# EAGLE board PCB (EAGLE 9.7.0), part 1 of 2
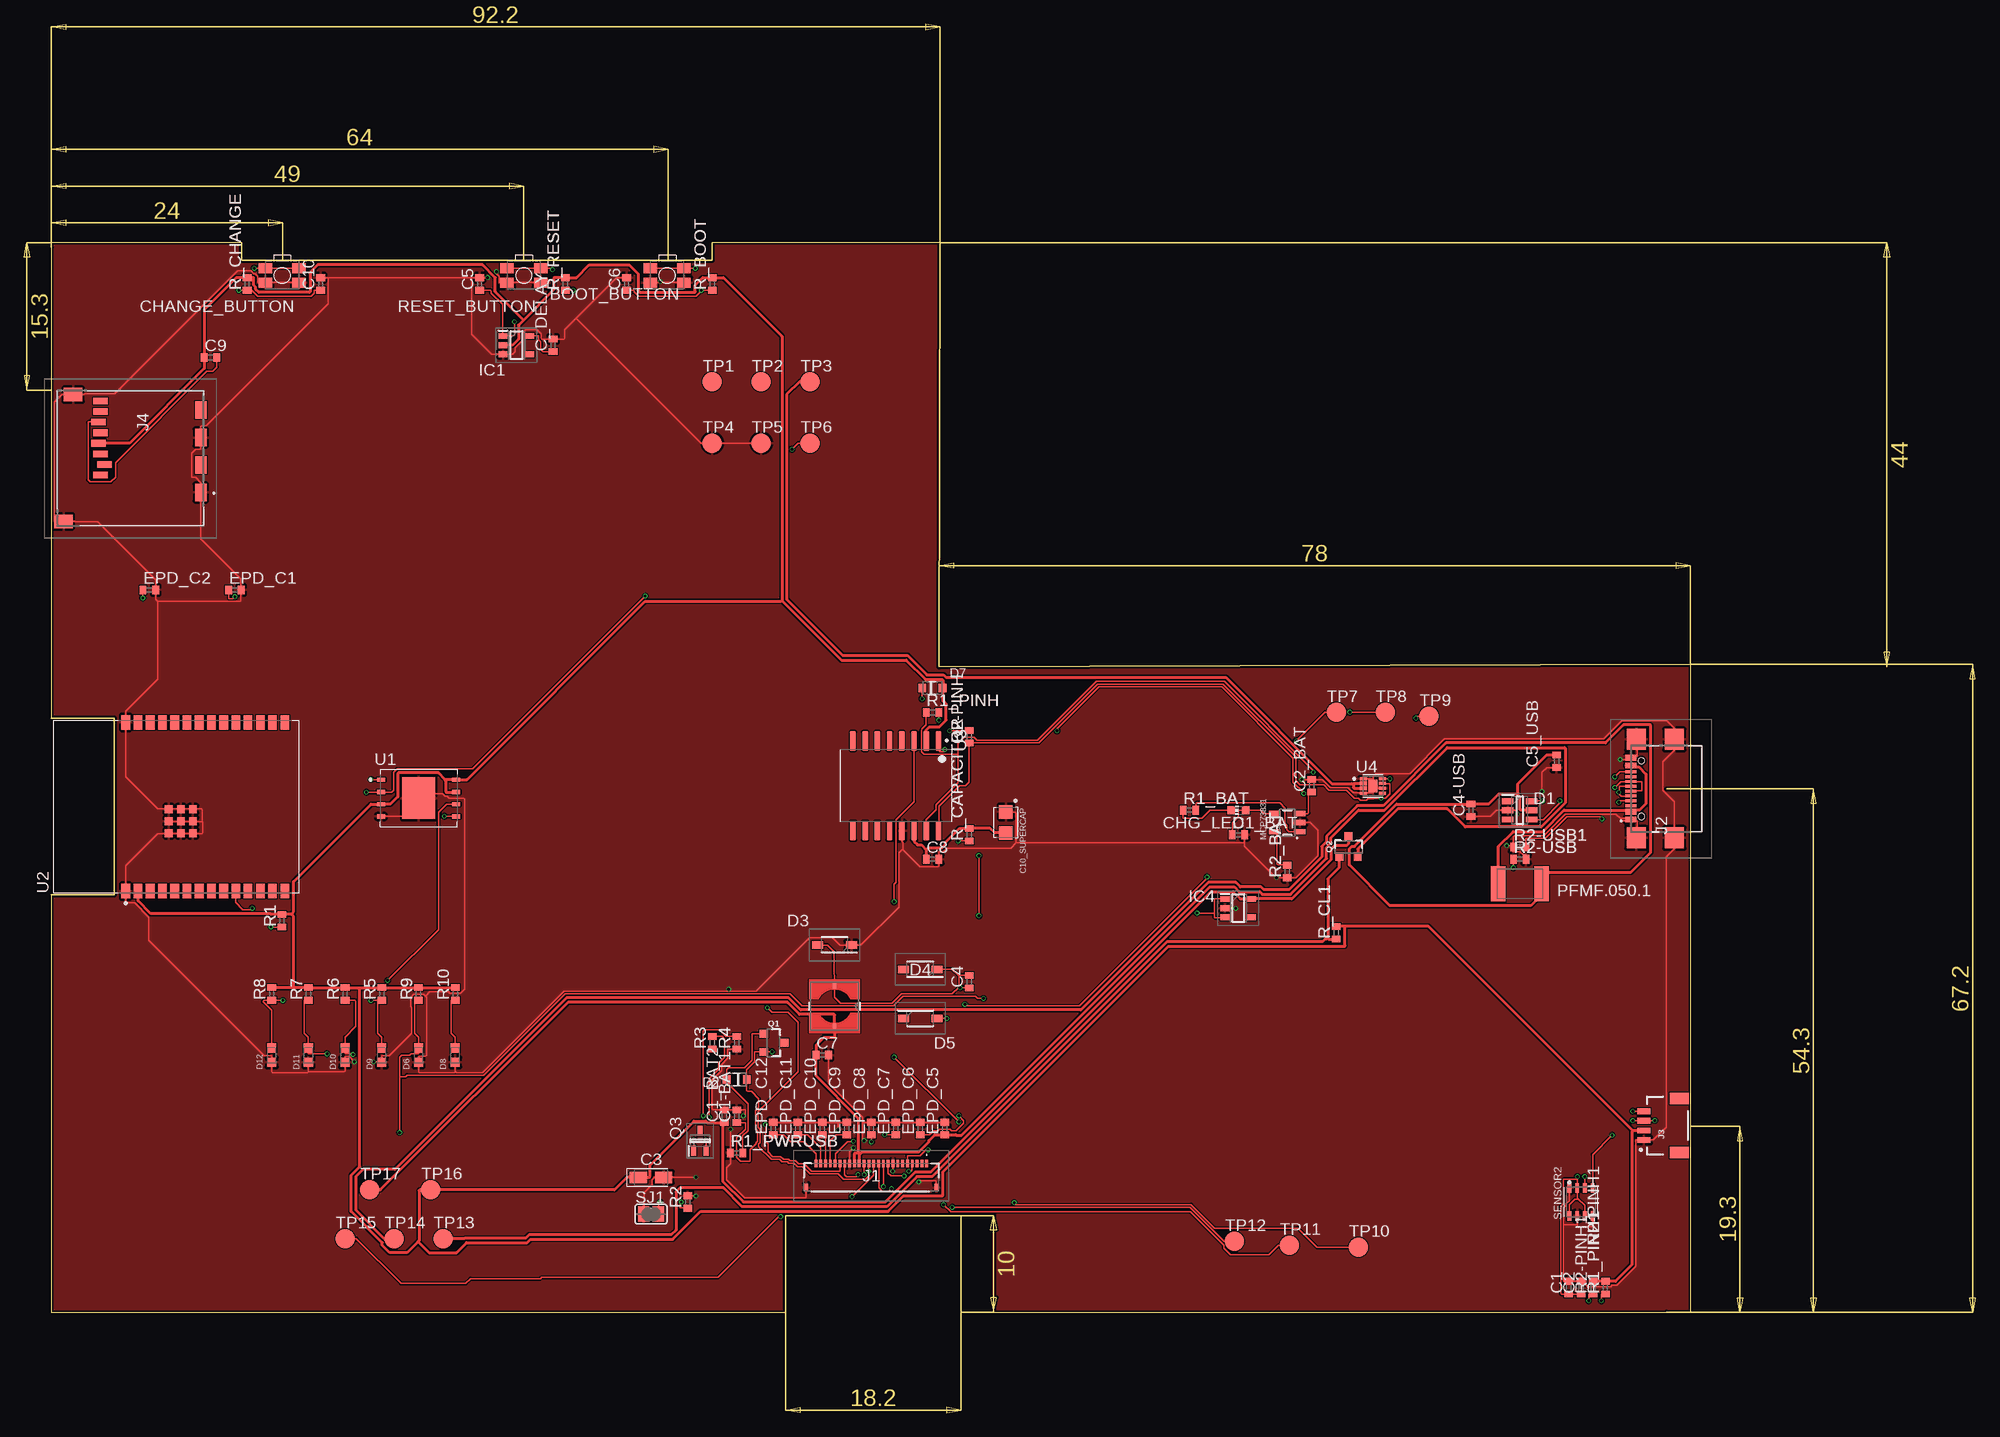
[diagram p0: board, top side]
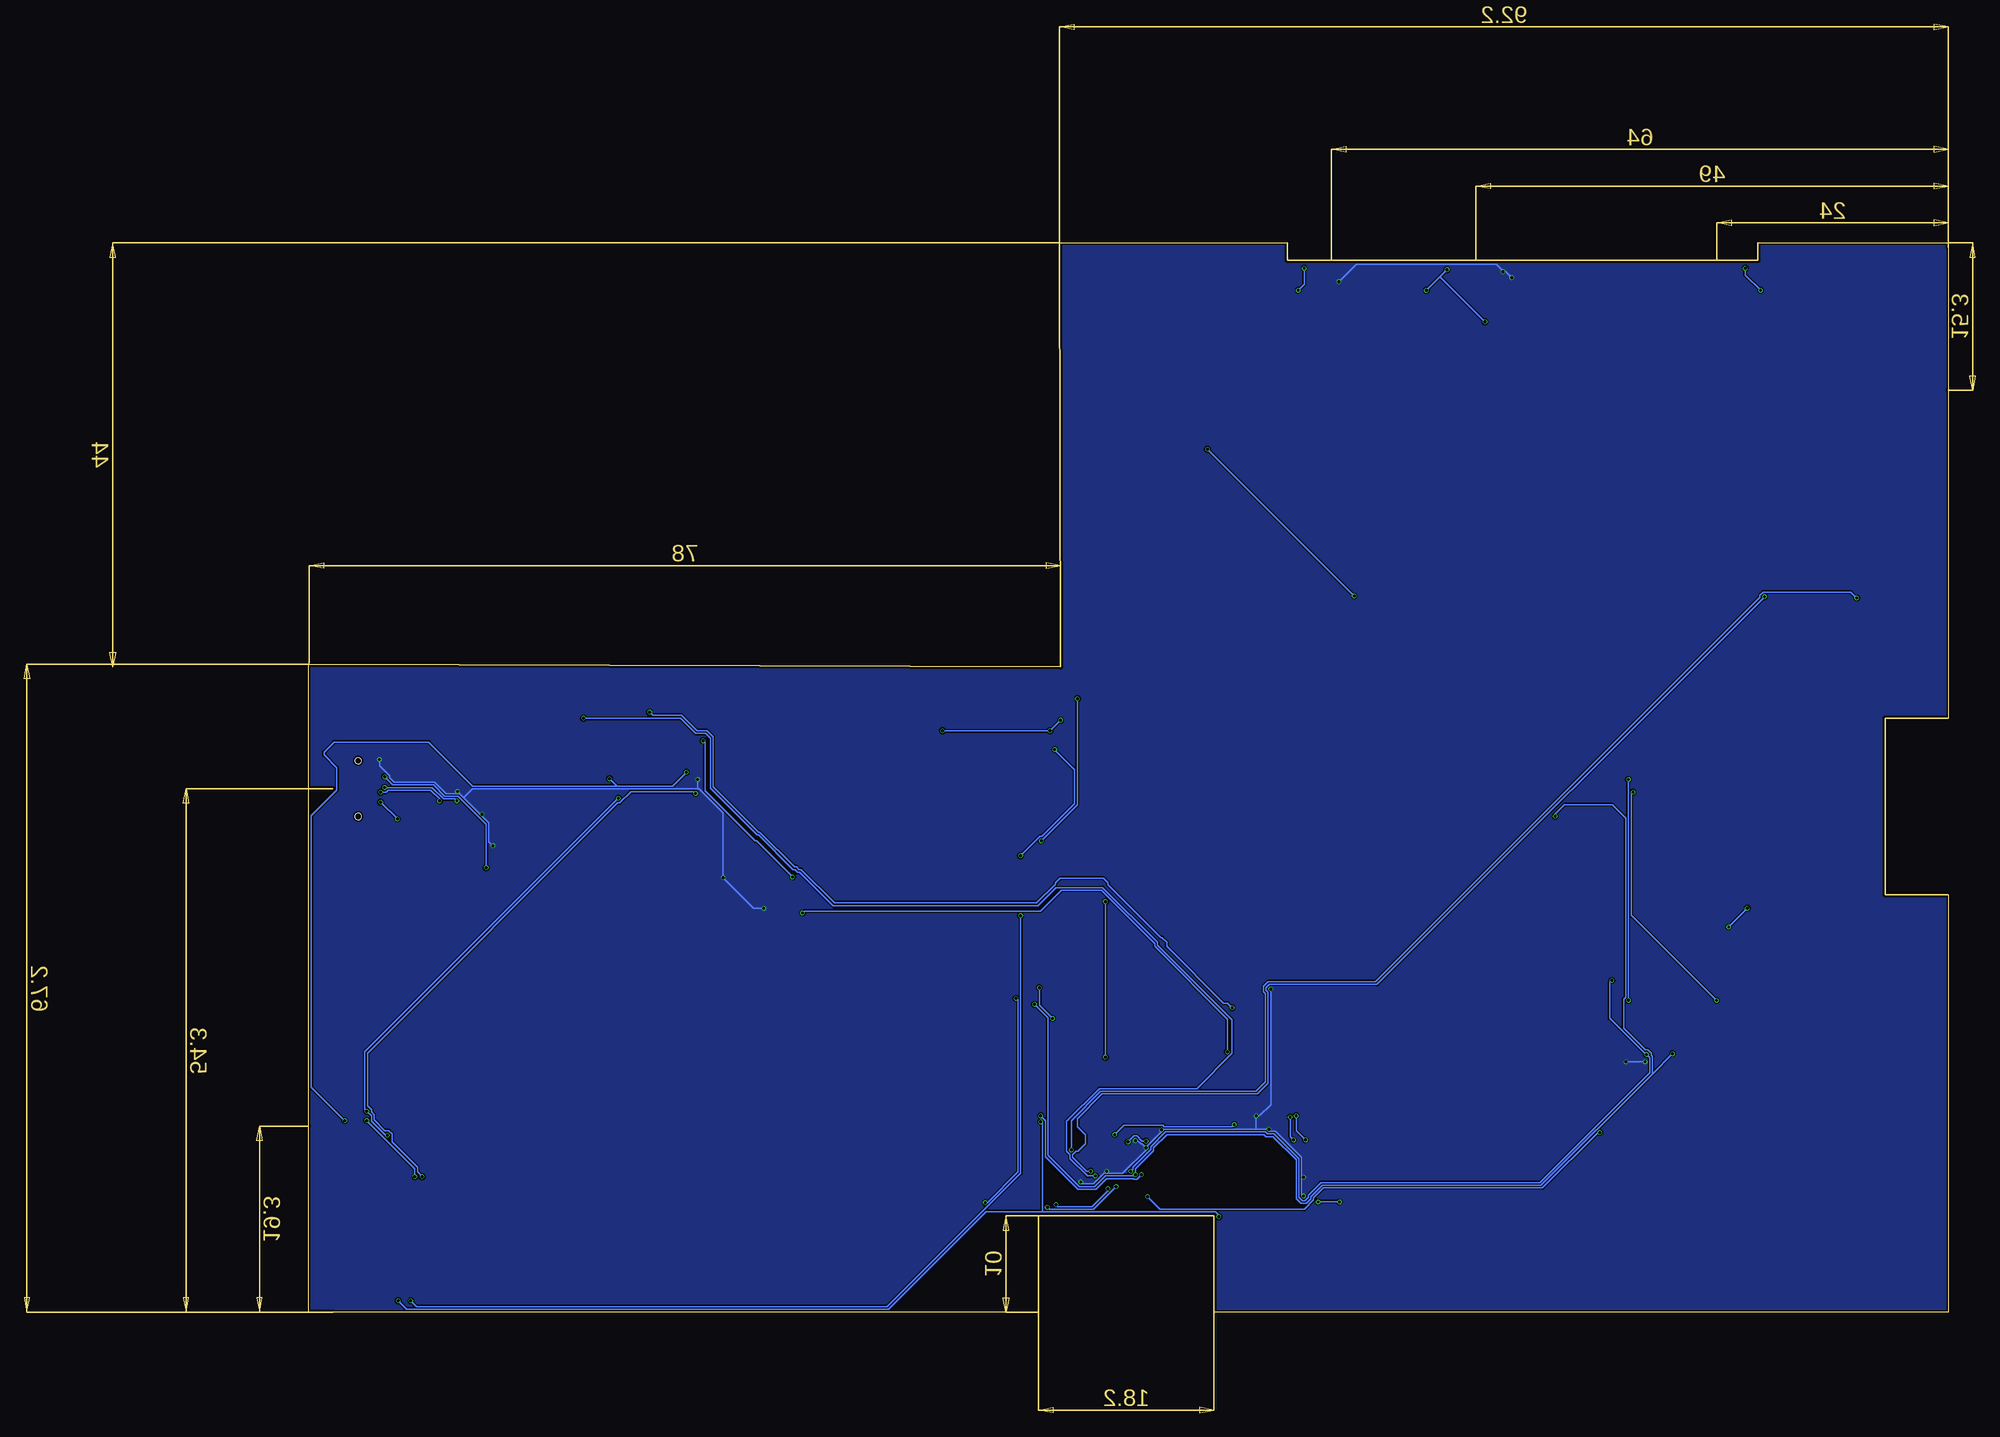
[diagram p1: board, bottom side, seen from below]

Size 170.16 x 110.97 mm. Coordinates in mm from the lower left corner, seen from the top.
Outline: 0,0 76.2,0 76.2,10 94.4,10 94.4,0 94.49,0 170.16,0 170.16,67.2 92.12,66.97 92.2,110.97 68.58,110.97 68.58,109.12 19.73,109.12 19.73,110.97 0,110.97 0,61.6 6.5,61.6 6.5,43.3 0,43.3 0,0
Copper layers (1*16): Top 0.035mm / dielectric 1.6mm / Bottom 0.035mm
Design rules "jlcpcb-2layers.dru": minimum track width 0.15mm, minimum drill 0.3mm, track to track 5mil, track to pad 5mil, pad to pad 5mil, via to via 5mil, smd to smd 5mil, copper to edge 0.2mm, drill to drill 6mil, minimum pad ring 10mil, minimum via ring 3mil, stop-mask expansion 4mil, vias tented up to drill 0mil, thermal gap 10mil
Net classes: 0 default: width 0.15 mm; 1 net class: width 0.3 mm

## Footprints (pad centres in the part's own frame; a part is rotated, then mirrored left to right if it is on the bottom)
MYBUTTON = smd 1.4 x 1.05: 1 1.75,0.75; 2 -1.75,0.75; 3 -1.75,-0.75; 4 1.75,-0.75
EAGLE-LTSPICE_C0402 = smd 0.7 x 0.9: 1 -0.65,0; 2 0.65,0
ESP32_WROVER_EAGLE-LTSPICE_C0402 = smd 0.7 x 0.9: 1 -0.65,0; 2 0.65,0
CAPMP3216X180N = smd 1.796 x 1.189: 1 -1.31,0; 2 1.31,0
CAPCP3225X100N = smd 1.4 x 1.4: 1 -1.1,0; 2 1.1,0
ADAFRUIT_CHIP-LED0603 = smd 0.8 x 0.8: A 0,-0.75; C 0,0.75
SOT95P280X145-6N = smd 1.2 x 0.6: 1 -1.25,0.95; 2 -1.25,0; 3 -1.25,-0.95; 4 1.25,-0.95; 5 1.25,0; 6 1.25,0.95
ESP32_WROVER_AVX---SD0805S020S1R0_AVX_SD0805S020S1R0_0 = smd 0.8 x 0.9: 1 -1.05,0; 2 1.05,0
SOD3716X135N = smd 1.15 x 0.8: 1 -1.75,0; 2 1.75,0
DIOC1608X36N = smd 0.97 x 0.94: 1 -0.75,0; 2 0.75,0
SOT95P280X125-5N = smd 0.9 x 0.6: 1 -1.4,0.95; 2 -1.4,0; 3 -1.4,-0.95; 4 1.4,-0.95; 5 1.4,0.95
SOT95P280X120-5N = smd 0.9 x 0.6: 1 -1.4,0.95; 2 -1.4,0; 3 -1.4,-0.95; 4 1.4,-0.95; 5 1.4,0.95
FH34SRJ24S05SH99 = smd 0.3 x 0.8: 1 5.75,1.45; 2 5.25,1.45; 3 4.75,1.45; 4 4.25,1.45; 5 3.75,1.45; 6 3.25,1.45; 7 2.75,1.45; 8 2.25,1.45; 9 1.75,1.45; 10 1.25,1.45; 11 0.75,1.45; 12 0.25,1.45; 13 -0.25,1.45; 14 -0.75,1.45; 15 -1.25,1.45; 16 -1.75,1.45; 17 -2.25,1.45; 18 -2.75,1.45; 19 -3.25,1.45; 20 -3.75,1.45; 21 -4.25,1.45; 22 -4.75,1.45; 23 -5.25,1.45; 24 -5.75,1.45 | smd 0.4 x 0.8: MP1 6.75,-1.05; MP2 -6.75,-1.05
SAMACSYS_PARTS_USB4110GFA = smd 0.3 x 1.15: A1 -3.35,3.678; A4 -2.55,3.678; A5 -1.25,3.678; A6 -0.25,3.678; A7 0.25,3.678; A8 1.25,3.678; A9 2.55,3.678; A12 3.35,3.678; B1 3.05,3.678; B4 2.25,3.678; B5 1.75,3.678; B6 0.75,3.678; B7 -0.75,3.678; B8 -1.75,3.678; B9 -2.25,3.678; B12 -3.05,3.678 | smd 2.18 x 2: MP1 -5.11,-0.827; MP2 5.11,-0.827; MP3 -5.11,3.103; MP4 5.11,3.103 | hole 0.65: -2.89,2.603; 2.89,2.603
JST04_1MM_RA = smd 0.6 x 1.35: 1 -1.5,0; 2 -0.5,0; 3 0.5,0; 4 1.5,0 | smd 1.2 x 2: NC1 2.8,-3.675; NC2 -2.8,-3.675
112ATAARR03ATTEND = smd 1.8 x 1.2: G1 10.6,10.4; G2 4.9,10.4; S1 7.75,10.4; S2 2.05,10.4 | smd 1.4 x 1.9: G3 13.6,-3.85; G4 0.45,-2.85 | smd 0.7 x 1.5: P1 8.8,0; P2 7.7,0.4; P3 6.6,0; P4 5.5,-0.2; P5 4.4,0; P6 3.3,-0.2; P7 2.2,0; P8 1.1,0
IND_4828-WE-TPC_WRE = smd 0.61 x 0.305: 1 -2.086,0; 2 2.086,0
ESP32_WROVER_SPARKFUN-IC-POWER_SOT23-5 = smd 0.55 x 1.2: 1 -0.95,-1.3; 2 0,-1.3; 3 0.95,-1.3; 4 0.95,1.3; 5 -0.95,1.3
ESP32C6_VARISTOR_CT/CN1812 = smd 1.5 x 3.6: 1 -2.25,0; 2 2.25,0
ESP32_WROVER_SPARKFUN-DISCRETESEMI_SOT23-3 = smd 0.8 x 0.9: 1 -0.95,-1; 2 0.95,-1; 3 0,1.1
SOT65P210X110-3N = smd 1.05 x 0.5: 1 -1.05,0.65; 2 -1.05,-0.65; 3 1.05,0
ESP32_WROVER_EAGLE-LTSPICE_R0402 = smd 0.7 x 0.9: 1 -0.65,0; 2 0.65,0
ESP32_WROVER_BME680_PSON80P300X300X100-8N = smd 1.016 x 0.5: 1 1.458,1.2; 2 1.458,0.4; 3 1.458,-0.4; 4 1.458,-1.2; 5 -1.458,-1.22; 6 -1.458,-0.4; 7 -1.458,0.4; 8 -1.458,1.2
SJ = smd 1.168 x 1.6: 1 -0.762,0; 2 0.762,0
TP20R = smd 2 x 2: TP 0,0
SON127P600X800X80-9N = smd 0.94 x 0.44: 1 -3.895,1.905; 2 -3.895,0.635; 3 -3.895,-0.635; 4 -3.895,-1.905; 5 3.895,-1.905; 6 3.895,-0.635; 7 3.895,0.635; 8 3.895,1.905 | smd 3.4 x 4.3: 9 0,0
XCVR_ESP32-C6-WROOM-1-N8 = smd 1.5 x 0.9: 1 -8.75,5.26; 2 -8.75,3.99; 3 -8.75,2.72; 4 -8.75,1.45; 5 -8.75,0.18; 6 -8.75,-1.09; 7 -8.75,-2.36; 8 -8.75,-3.63; 9 -8.75,-4.9; 10 -8.75,-6.17; 11 -8.75,-7.44; 12 -8.75,-8.71; 13 -8.75,-9.98; 14 -8.75,-11.25; 15 8.75,-11.25; 16 8.75,-9.98; 17 8.75,-8.71; 18 8.75,-7.44; 19 8.75,-6.17; 20 8.75,-4.9; 21 8.75,-3.63; 22 8.75,-2.36; 23 8.75,-1.09; 24 8.75,0.18; 25 8.75,1.45; 26 8.75,2.72; 27 8.75,3.99; 28 8.75,5.26 | smd 0.8 x 0.8: 29_1 -2.755,0.79; 29_2 -1.505,0.79; 29_3 -0.255,0.79; 29_4 -2.755,-0.46; 29_5 -1.505,-0.46; 29_6 -0.255,-0.46; 29_7 -2.755,-1.71; 29_8 -1.505,-1.71; 29_9 -0.255,-1.71
SOIC127P1032X265-16N = smd 2.05 x 0.59: 1 -4.655,4.445; 2 -4.655,3.175; 3 -4.655,1.905; 4 -4.655,0.635; 5 -4.655,-0.635; 6 -4.655,-1.905; 7 -4.655,-3.175; 8 -4.655,-4.445; 9 4.655,-4.445; 10 4.655,-3.175; 11 4.655,-1.905; 12 4.655,-0.635; 13 4.655,0.635; 14 4.655,1.905; 15 4.655,3.175; 16 4.655,4.445
SON50P200X200X80-9N = smd 0.76 x 0.27: 1 -0.985,0.75; 4 -0.985,-0.75; 5 0.985,-0.75; 6 0.985,-0.25; 7 0.985,0.25; 8 0.985,0.75 | smd 0.813 x 0.406: 2 -0.985,0.25; 3 -0.985,-0.25 | smd 0.9 x 1.3: 9 0,0

## Placement (x,y rotation side)
BOOT_BUTTON  BUTTON_CUSYOMV1  [MYBUTTON]  63.91,107.57 180 top
C1  100nF  [EAGLE-LTSPICE_C0402]  157.48,2.54 90 top
C1-BAT1  4.7uF  [ESP32_WROVER_EAGLE-LTSPICE_C0402]  71.12,20.32 90 top
C1_BAT  4.7uF  [EAGLE-LTSPICE_C0402]  123.19,49.53 0 top
C1_BAT2  4.7uF  [ESP32_WROVER_EAGLE-LTSPICE_C0402]  69.85,20.32 90 top
C2  100nF  [EAGLE-LTSPICE_C0402]  158.75,2.54 90 top
C2_BAT  4.7uF  [EAGLE-LTSPICE_C0402]  130.81,54.61 90 top
C3  100uF TANT  [CAPMP3216X180N]  62.23,13.97 0 top
C4  4.7uF/25V  [EAGLE-LTSPICE_C0402]  95.25,34.29 90 top
C4-USB  100nF  [ESP32_WROVER_EAGLE-LTSPICE_C0402]  147.32,52.07 90 top
C5  1uF  [EAGLE-LTSPICE_C0402]  44.45,106.68 90 top
C5_USB  4.7uF  [ESP32_WROVER_EAGLE-LTSPICE_C0402]  156.21,57.15 90 top
C6  100nF  [EAGLE-LTSPICE_C0402]  59.69,106.68 90 top
C7  10uF  [EAGLE-LTSPICE_C0402]  80.01,26.67 0 top
C8  100nF  [EAGLE-LTSPICE_C0402]  91.44,46.99 0 top
C9  100nF  [EAGLE-LTSPICE_C0402]  16.51,99.06 0 top
C10  100nF  [EAGLE-LTSPICE_C0402]  27.94,106.68 90 top
C10_SUPERCAP  CPH3225A  [CAPCP3225X100N]  99.06,50.8 270 top
C_DELAY  100nF  [EAGLE-LTSPICE_C0402]  52.07,100.33 90 top
CHANGE_BUTTON  BUTTON_CUSYOMV1  [MYBUTTON]  23.95,107.57 180 top
CHG_LED  [ADAFRUIT_CHIP-LED0603]  123.19,52.07 90 top
D1  USBLC6-2SC6Y  [SOT95P280X145-6N]  152.4,52.07 0 top
D2  ESP32_WROVER_AVX---SD0805S020S1R0_AVX_SD0805S020S1R0_0_0AVX_SD0805S020S1R0_0_0  [ESP32_WROVER_AVX---SD0805S020S1R0_AVX_SD0805S020S1R0_0]  71.12,24.13 180 top
D3  MBR0530  [SOD3716X135N]  81.28,38.1 180 top
D4  MBR0530  [SOD3716X135N]  90.17,35.56 180 top
D5  MBR0530  [SOD3716X135N]  90.17,30.48 0 top
D6  PGB1010603MR  [DIOC1608X36N]  38.1,26.67 90 top
D7  ESP32_WROVER_AVX---SD0805S020S1R0_AVX_SD0805S020S1R0_0_0AVX_SD0805S020S1R0_0_0  [ESP32_WROVER_AVX---SD0805S020S1R0_AVX_SD0805S020S1R0_0]  91.44,64.77 0 top
D8  PGB1010603MR  [DIOC1608X36N]  41.91,26.67 90 top
D9  PGB1010603MR  [DIOC1608X36N]  34.29,26.67 90 top
D10  PGB1010603MR  [DIOC1608X36N]  30.48,26.67 90 top
D11  PGB1010603MR  [DIOC1608X36N]  26.67,26.67 90 top
D12  PGB1010603MR  [DIOC1608X36N]  22.86,26.67 90 top
EPD_C1  1uF/50V  [EAGLE-LTSPICE_C0402]  19.05,74.93 0 top
EPD_C2  1uF/50V  [EAGLE-LTSPICE_C0402]  10.16,74.93 0 top
EPD_C5  1uF/50V  [EAGLE-LTSPICE_C0402]  92.71,19.05 90 top
EPD_C6  1uF/50V  [EAGLE-LTSPICE_C0402]  90.17,19.05 90 top
EPD_C7  1uF/50V  [EAGLE-LTSPICE_C0402]  87.63,19.05 90 top
EPD_C8  1uF/50V  [EAGLE-LTSPICE_C0402]  85.09,19.05 90 top
EPD_C9  1uF/50V  [EAGLE-LTSPICE_C0402]  82.55,19.05 90 top
EPD_C10  1uF/50V  [EAGLE-LTSPICE_C0402]  80.01,19.05 90 top
EPD_C11  1uF/50V  [EAGLE-LTSPICE_C0402]  77.47,19.05 90 top
EPD_C12  1uF/50V  [EAGLE-LTSPICE_C0402]  74.93,19.05 90 top
IC1  BD5229G-TR  [SOT95P280X125-5N]  48.26,100.33 0 top
IC4  XC6220A331MR-G  [SOT95P280X120-5N]  123.19,41.91 0 top
J1  FH34SRJ-24S-0.5SH_99_  [FH34SRJ24S05SH99]  85.09,13.97 0 top
J2  SAMACSYS_PARTS_USB4110-GF-A  [SAMACSYS_PARTS_USB4110GFA]  167.61,54.31 90 top
J3  QWIIC_RIGHT_ANGLE  [JST04_1MM_RA]  165.28,19.35 90 top
J4  112A-TAAR-R03_ATTEND  [112ATAARR03ATTEND]  5.1,95.65 270 top
L1  68uH  [IND_4828-WE-TPC_WRE]  81.28,31.75 270 top
MCP73831  ESP32_WROVER_SPARKFUN-IC-POWER_MCP73831  [ESP32_WROVER_SPARKFUN-IC-POWER_SOT23-5]  128.27,50.8 90 top
PFMF.050.1  ESP32C6_VARISTORCN1812  [ESP32C6_VARISTOR_CT/CN1812]  152.4,44.45 0 top
Q1  20V/4.2A/52mΩ/1.4W  [ESP32_WROVER_SPARKFUN-DISCRETESEMI_SOT23-3]  74.93,27.94 270 top
Q2  20V/4.2A/52mΩ/1.4W  [ESP32_WROVER_SPARKFUN-DISCRETESEMI_SOT23-3]  134.62,48.26 0 top
Q3  SI1308EDL-T1-GE3  [SOT65P210X110-3N]  67.31,17.78 90 top
R1  10K  [ESP32_WROVER_EAGLE-LTSPICE_R0402]  23.93,40.61 90 top
R1_BAT  200  [ESP32_WROVER_EAGLE-LTSPICE_R0402]  118.11,52.07 0 top
R1_PINH  10K  [ESP32_WROVER_EAGLE-LTSPICE_R0402]  91.44,62.23 0 top
R1_PINH1  10K  [ESP32_WROVER_EAGLE-LTSPICE_R0402]  161.29,2.54 90 top
R1_PWRUSB  100K  [ESP32_WROVER_EAGLE-LTSPICE_R0402]  71.12,16.51 0 top
R2  2.2  [ESP32_WROVER_EAGLE-LTSPICE_R0402]  66.04,11.43 90 top
R2-PINH  10K  [ESP32_WROVER_EAGLE-LTSPICE_R0402]  95.25,59.69 90 top
R2-PINH1  10K  [ESP32_WROVER_EAGLE-LTSPICE_R0402]  160.02,2.54 90 top
R2-USB  5k1  [ESP32_WROVER_EAGLE-LTSPICE_R0402]  152.4,46.99 0 top
R2-USB1  5k1  [ESP32_WROVER_EAGLE-LTSPICE_R0402]  152.4,48.26 0 top
R2_BAT  2K  [ESP32_WROVER_EAGLE-LTSPICE_R0402]  128.27,45.72 90 top
R3  0.47  [ESP32_WROVER_EAGLE-LTSPICE_R0402]  68.58,27.94 90 top
R4  10K  [ESP32_WROVER_EAGLE-LTSPICE_R0402]  71.12,27.94 90 top
R5  10K  [ESP32_WROVER_EAGLE-LTSPICE_R0402]  34.29,33.02 90 top
R6  10K  [ESP32_WROVER_EAGLE-LTSPICE_R0402]  30.48,33.02 90 top
R7  10K  [ESP32_WROVER_EAGLE-LTSPICE_R0402]  26.67,33.02 90 top
R8  10K  [ESP32_WROVER_EAGLE-LTSPICE_R0402]  22.86,33.02 90 top
R9  10K  [ESP32_WROVER_EAGLE-LTSPICE_R0402]  38.1,33.02 90 top
R10  10K  [ESP32_WROVER_EAGLE-LTSPICE_R0402]  41.91,33.02 90 top
R_BOOT  10K  [ESP32_WROVER_EAGLE-LTSPICE_R0402]  68.58,106.68 90 top
R_CAPACITOR  15  [ESP32_WROVER_EAGLE-LTSPICE_R0402]  95.25,49.53 90 top
R_CHANGE  10K  [ESP32_WROVER_EAGLE-LTSPICE_R0402]  20.32,106.68 90 top
R_CL1  10K  [ESP32_WROVER_EAGLE-LTSPICE_R0402]  133.35,39.37 90 top
R_RESET  10K  [ESP32_WROVER_EAGLE-LTSPICE_R0402]  53.34,106.68 90 top
RESET_BUTTON  BUTTON_CUSYOMV1  [MYBUTTON]  49.02,107.57 180 top
SENSOR2  ESP32_WROVER_BME680_BME680  [ESP32_WROVER_BME680_PSON80P300X300X100-8N]  158.75,11.43 90 top
SJ1  [SJ]  62.23,10.16 0 top
TP1  TPTP20R  [TP20R]  68.58,96.52 0 top
TP2  TPTP20R  [TP20R]  73.66,96.52 0 top
TP3  TPTP20R  [TP20R]  78.74,96.52 0 top
TP4  TPTP20R  [TP20R]  68.58,90.17 0 top
TP5  TPTP20R  [TP20R]  73.66,90.17 0 top
TP6  TPTP20R  [TP20R]  78.74,90.17 0 top
TP7  TPTP20R  [TP20R]  133.35,62.23 0 top
TP8  TPTP20R  [TP20R]  138.43,62.23 0 top
TP9  TPTP20R  [TP20R]  142.98,61.83 0 top
TP10  TPTP20R  [TP20R]  135.66,6.75 0 top
TP11  TPTP20R  [TP20R]  128.48,6.95 0 top
TP12  TPTP20R  [TP20R]  122.8,7.35 0 top
TP13  TPTP20R  [TP20R]  40.64,7.62 0 top
TP14  TPTP20R  [TP20R]  35.56,7.62 0 top
TP15  TPTP20R  [TP20R]  30.48,7.62 0 top
TP16  TPTP20R  [TP20R]  39.37,12.7 0 top
TP17  TPTP20R  [TP20R]  33.02,12.7 0 top
U1  W25Q512JVEIQ  [SON127P600X800X80-9N]  38.1,53.34 0 top
U2  ESP32-C6-WROOM-1-N8  [XCVR_ESP32-C6-WROOM-1-N8]  12.97,52.44 90 top
U3  DS3231SN#  [SOIC127P1032X265-16N]  87.63,54.61 270 top
U4  MAX17048G+T10  [SON50P200X200X80-9N]  137.16,54.61 0 top

## Library data of the parts
BOOT_BUTTON CHANGE_BUTTON CHG_LED PFMF.050.1 RESET_BUTTON SJ1 TP1-TP17 = DeskAssistant v19 v1
C1 C1-BAT1 C1_BAT C1_BAT2 C2 C2_BAT C4 C4-USB C5 C5_USB C6-C10 C_DELAY EPD_C1 EPD_C2 EPD_C5-EPD_C12 = DeskAssistant v19 v1; SPICEMODEL: NONE; SPICEPREFIX: C
C3 = Capacitor; CATEGORY: Capacitor; PACKAGE_SIZE: 1206; PACKAGE_TYPE: SMD; SUBCATEGORY: Tantalum Capacitors; TYPE: Polymer Capacitors
C10_SUPERCAP = DeskAssistant v19 v1; AVAILABILITY: Not in stock; CHECK_PRICES: https://www.snapeda.com/parts/CPH3225A/Seiko+Instruments/view-part/?ref=eda; DESCRIPTION: 11 mF (EDLC) Supercapacitor 3.3 V 1210 (3225 Metric) - -; MF: Seiko Instruments; MP: CPH3225A; PACKAGE: 1210 Seiko; PRICE: None; PURCHASE-URL: https://www.snapeda.com/api/url_track_click_mouser/?unipart_id=562593&manufacturer=Seiko Instruments&part_name=CPH3225A&search_term=None; SNAPEDA_LINK: https://www.snapeda.com/parts/CPH3225A/Seiko+Instruments/view-part/?ref=snap
D1 = DeskAssistant v19 v1; AVAILABILITY: In Stock; CHECK_PRICES: https://www.snapeda.com/parts/USBLC6-2SC6Y/STMicroelectronics/view-part/?ref=eda; DESCRIPTION: 17V Clamp 5A (8/20µs) Ipp Tvs Diode Surface Mount SOT-23-6; MF: STMicroelectronics; MP: USBLC6-2SC6Y; PACKAGE: SOT-23-6 STMicroelectronics; PRICE: None; SNAPEDA_LINK: https://www.snapeda.com/parts/USBLC6-2SC6Y/STMicroelectronics/view-part/?ref=snap
D2 D7 = DeskAssistant v19 v1; CENTROID_NOT_SPECIFIED: No; DATASHEET: http://datasheets.avx.com/schottky.pdf; DIGIKEY_DESCRIPTION: DIODE SCHOTTKY 20V 1A 0805; DIGIKEY_PART_NUMBER: 478-7800-1-ND; LEAD_FREE: yes; MF: AVX; MOUSER_PART_NUMBER: 581-SD0805S020S1R0; PACKAGE: 0805 (2012 metric); PREFIX: D; ROHS: yes; TEMPERATURE_RANGE_HIGH: +125°C; TEMPERATURE_RANGE_LOW: -55°C
D3-D5 = DeskAssistant v19 v1; AVAILABILITY: In Stock; CHECK_PRICES: https://www.snapeda.com/parts/MBR0530/Onsemi/view-part/?ref=eda; DESCRIPTION: Diode Schottky 30 V 500mA Surface Mount SOD-123; MF: ON Semiconductor; MP: MBR0530; PACKAGE: SOD-123-2 ON Semiconductor; PRICE: None; PURCHASE-URL: https://www.snapeda.com/api/url_track_click_mouser/?unipart_id=179458&manufacturer=ON Semiconductor&part_name=MBR0530&search_term=None; SNAPEDA_LINK: https://www.snapeda.com/parts/MBR0530/Onsemi/view-part/?ref=snap
D6 D8-D12 = DeskAssistant v19 v1; AVAILABILITY: In Stock; CHECK_PRICES: https://www.snapeda.com/parts/PGB1010603MR/Littelfuse/view-part/?ref=eda; DESCRIPTION: 150V (Typ) Clamp - Ipp Tvs Diode Surface Mount 0603 (1608 Metric); MF: Littelfuse Inc.; MP: PGB1010603MR; PACKAGE: 0603 Littelfuse Inc.; PRICE: None; PURCHASE-URL: https://www.snapeda.com/api/url_track_click_mouser/?unipart_id=5659453&manufacturer=Littelfuse Inc.&part_name=PGB1010603MR&search_term=None; SNAPEDA_LINK: https://www.snapeda.com/parts/PGB1010603MR/Littelfuse/view-part/?ref=snap
IC1 = DeskAssistant v19 v1; DESCRIPTION: Voltage Detector with Adjustable Delay Time: CMOS processes are utilized to develop high precision, low current consumption CMOS reset ICs that allow arbitrary setting of the delay time. The extensive lineup includes both Nch Open Drain and CMOS output types in a wide range of detection voltages (from 2.3V to 6.0V, in 0.1V steps), enabling selection of the ideal solution based on customer requirements. In addition, the entire series is of course both lead-free and RoHS-compliant.; HEIGHT: 1.25mm; MANUFACTURER_NAME: ROHM Semiconductor; MANUFACTURER_PART_NUMBER: BD5229G-TR; MOUSER_PART_NUMBER: 755-BD5229G-TR; MOUSER_PRICE-STOCK: https://www.mouser.co.uk/ProductDetail/ROHM-Semiconductor/BD5229G-TR?qs=4kLU8WoGk0vvnhrrYwdszw%3D%3D
IC4 = DeskAssistant v19 v1; DESCRIPTION: LDO Voltage Regulators; HEIGHT: 1.2mm; MANUFACTURER_NAME: Torex; MANUFACTURER_PART_NUMBER: XC6220A331MR-G; MOUSER_PART_NUMBER: 865-XC6220A331MR-G; MOUSER_PRICE-STOCK: https://www.mouser.co.uk/ProductDetail/Torex-Semiconductor/XC6220A331MR-G?qs=AsjdqWjXhJ8ZSWznL1J0gg%3D%3D
J1 = DeskAssistant v19 v1; DESCRIPTION: 24 Position FFC, FPC Connector Contacts, Top and Bottom 0.020" (0.50mm) Surface Mount, Right Angle; HEIGHT: 1.1mm; MANUFACTURER_NAME: Hirose; MANUFACTURER_PART_NUMBER: FH34SRJ-24S-0.5SH(99); MOUSER_PART_NUMBER: 798-FH34SRJ24S05SH99; MOUSER_PRICE-STOCK: https://www.mouser.co.uk/ProductDetail/Hirose-Connector/FH34SRJ-24S-0.5SH99?qs=vcbW%252B4%252BSTIpKBl5ap9J8Fw%3D%3D
J2 = DeskAssistant v19 v1; DESCRIPTION: CONN USB 2.0 TYPE-C R/A SMT; HEIGHT: 3.26mm; MANUFACTURER_NAME: GCT (GLOBAL CONNECTOR TECHNOLOGY); MANUFACTURER_PART_NUMBER: USB4110-GF-A; MOUSER_PART_NUMBER: 640-USB4110-GF-A; MOUSER_PRICE-STOCK: https://www.mouser.co.uk/ProductDetail/GCT/USB4110-GF-A?qs=KUoIvG%2F9IlYiZvIXQjyJeA%3D%3D
J3 = DeskAssistant v19 v1; PROD_ID: CONN-13694
J4 = DeskAssistant v19 v1; DESCRIPTION: Micro SD Card Socket, Push-Push Type, Top Mount, SMT, H=1.83mm, 10u; HEIGHT: 1.9mm; MANUFACTURER_NAME: ATTEND; MANUFACTURER_PART_NUMBER: 112A-TAAR-R03 ATTEND
L1 = DeskAssistant v19 v1; COPYRIGHT: Copyright (C) 2024 Ultra Librarian. All rights reserved.; MANUFACTURER_PART_NUMBER: 744043680; MFR_NAME: Wurth Electronics
MCP73831 = DeskAssistant v19 v1; PROD_ID: IC-09995
Q1 Q2 = DeskAssistant v19 v1; PROD_ID: TRAN-14388
Q3 = DeskAssistant v19 v1; AVAILABILITY: In Stock; CHECK_PRICES: https://www.snapeda.com/parts/SI1308EDL-T1-GE3/Vishay+Siliconix/view-part/?ref=eda; DESCRIPTION: Si1308EDL-T1-GE3 N-channel MOSFET Transistor, 1.5 A, 30 V, 3-Pin SC-70 | Siliconix / Vishay SI1308EDL-T1-GE3; MF: Vishay Siliconix; MP: SI1308EDL-T1-GE3; PACKAGE: SOT-323 Vishay Semiconductor; PRICE: None; PURCHASE-URL: https://www.snapeda.com/api/url_track_click_mouser/?unipart_id=274603&manufacturer=Vishay Siliconix&part_name=SI1308EDL-T1-GE3&search_term=None; SNAPEDA_LINK: https://www.snapeda.com/parts/SI1308EDL-T1-GE3/Vishay+Siliconix/view-part/?ref=snap
R1 R1_BAT R1_PINH R1_PINH1 R1_PWRUSB R2 R2-PINH R2-PINH1 R2-USB R2-USB1 R2_BAT R3-R10 R_BOOT R_CAPACITOR R_CHANGE R_CL1 R_RESET = DeskAssistant v19 v1; SPICEMODEL: NONE; SPICEPREFIX: R
SENSOR2 = DeskAssistant v19 v1; AVAILABILITY: Unavailable; DESCRIPTION: Integrated Environmental Unit; MF: Bosch Sensortec; MP: BME680; PACKAGE: LGA-8 Bosch Tools; PRICE: None
U1 = DeskAssistant v19 v1; AVAILABILITY: In Stock; CHECK_PRICES: https://www.snapeda.com/parts/W25Q512JVEIQ/Winbond+Electronics/view-part/?ref=eda; DESCRIPTION: FLASH - NOR Memory IC 512Mb (64M x 8) SPI - Quad I/O 133 MHz 8-WSON (8x6); MF: Winbond Electronics; MP: W25Q512JVEIQ; PACKAGE: Package; PRICE: None; SNAPEDA_LINK: https://www.snapeda.com/parts/W25Q512JVEIQ/Winbond+Electronics/view-part/?ref=snap
U2 = DeskAssistant v19 v1; AVAILABILITY: In Stock; CHECK_PRICES: https://www.snapeda.com/parts/ESP32-C6-WROOM-1-N8/Espressif+Systems/view-part/?ref=eda; DESCRIPTION: Multiprotocol Modules ESP32-C6 module, Wi-Fi 6 in 2.4 GHz band, Bluetooth 5, Zigbee 3.0 and Thread. ESP34-WROOM Compatible - ENGINEERING SAMPLE; MF: Espressif Systems; MP: ESP32-C6-WROOM-1-N8; PACKAGE: None; PRICE: None; SNAPEDA_LINK: https://www.snapeda.com/parts/ESP32-C6-WROOM-1-N8/Espressif+Systems/view-part/?ref=snap
U3 = DeskAssistant v19 v1; AVAILABILITY: In Stock; CHECK_PRICES: https://www.snapeda.com/parts/DS3231SN%23/Analog+Devices/view-part/?ref=eda; DESCRIPTION: Extremely Accurate I²C-Integrated RTC/TCXO/Crystal; MF: Analog Devices; MP: DS3231SN#; PACKAGE: SOIC-16 Maxim; PRICE: None; PURCHASE-URL: https://www.snapeda.com/api/url_track_click_mouser/?unipart_id=99048&manufacturer=Analog Devices&part_name=DS3231SN#&search_term=None; SNAPEDA_LINK: https://www.snapeda.com/parts/DS3231SN%23/Analog+Devices/view-part/?ref=snap
U4 = DeskAssistant v19 v1; AVAILABILITY: In Stock; CHECK_PRICES: https://www.snapeda.com/parts/MAX17048G+T10/Analog+Devices/view-part/?ref=eda; DESCRIPTION: 3µA 1-Cell/2-Cell Fuel Gauge with ModelGauge; MF: Analog Devices; MP: MAX17048G+T10; PACKAGE: TDFN-8 Maxim; PRICE: None; PURCHASE-URL: https://www.snapeda.com/api/url_track_click_mouser/?unipart_id=329239&manufacturer=Analog Devices&part_name=MAX17048G+T10&search_term=None; SNAPEDA_LINK: https://www.snapeda.com/parts/MAX17048G+T10/Analog+Devices/view-part/?ref=snap

## Nets
3V3 [net class]: C1_BAT2.1 C3.1 C9.1 D7.2 IC1.2 IC4.5 J3.2 J4.P4 Q2.3 R1.2 R1_PINH1.2 R2-PINH1.2 R5.2 R6.2 R7.2 R8.2 R9.2 R10.2 R_BOOT.2 R_CHANGE.2 R_CL1.2 R_RESET.2 TP16.TP U1.3 U1.7 U1.8 U2.2 U3.2
32KHZ: R2-PINH1.1 U3.1
DN: D1.4 J2.A7 J2.B7
DP: D1.6 J2.A6 J2.B6
EPD_3V3 [net class]: C7.1 EPD_C5.1 J1.15 J1.16 L1.2 Q2.2 TP17.TP
EPD_3V3_C [net class]: Q2.1 R_CL1.1 TP13.TP
EPD_BUSY: J1.9 TP9.TP
EPD_CS: D6.2 J1.12 R9.1 TP10.TP
EPD_DC: J1.11 TP11.TP
EPD_RST: J1.10 TP12.TP
FLASH_CS: D9.2 R5.1 U1.1
GDR: J1.2
GND: BOOT_BUTTON.1 BOOT_BUTTON.2 C1-BAT1.2 C1.2 C1_BAT2.2 C1_BAT.2 C2.2 C2_BAT.2 C3.2 C4-USB.1 C5.2 C5_USB.1 C6.2 C7.2 C8.2 C10.2 C10_SUPERCAP.1 C_DELAY.2 CHANGE_BUTTON.1 CHANGE_BUTTON.2 D1.2 D3.1 D6.1 D8.1 D9.1 D10.1 D11.1 D12.1 EPD_C1.2 EPD_C2.2 EPD_C5.2 EPD_C6.2 EPD_C7.2 EPD_C8.2 EPD_C9.2 EPD_C10.2 EPD_C11.2 EPD_C12.2 IC1.3 IC4.2 J1.8 J1.17 J1.MP1 J1.MP2 J2.A1 J2.A12 J2.B1 J2.B12 J2.MP1 J2.MP2 J2.MP3 J2.MP4 J3.1 J4.G1 J4.G2 J4.G3 J4.G4 MCP73831.2 R1_PWRUSB.1 R2-USB1.1 R2-USB.2 R2.2 R2_BAT.1 R4.1 RESET_BUTTON.1 RESET_BUTTON.2 SENSOR2.1 SENSOR2.5 SENSOR2.7 SJ1.1 TP4.TP TP5.TP U1.4 U1.9 U2.1 U2.28 U2.29_1 U2.29_2 U2.29_3 U2.29_4 U2.29_5 U2.29_6 U2.29_7 U2.29_8 U2.29_9 U3.13 U4.1 U4.4 U4.6 U4.9
I2C_PW: C1.1 C2.1 R1_PINH.2 R2-PINH.2 SENSOR2.2 SENSOR2.6 SENSOR2.8
INT_RTC: R1_PINH1.1 TP15.TP U3.3
IO/BOOT: BOOT_BUTTON.3 BOOT_BUTTON.4 C6.1 R_BOOT.1
IO/CHANGE: C10.1 CHANGE_BUTTON.3 CHANGE_BUTTON.4 R_CHANGE.1
MISO: D12.2 R8.1 TP6.TP U1.2
MOSI: D11.2 J1.14 R7.1 TP7.TP U1.5
N$1: D2.2 Q1.1 R1_PWRUSB.2
N$2: J2.B5 R2-USB.1
N$3: J2.A5 R2-USB1.2
N$4: Q1.3
N$5: C1-BAT1.1 D2.1 IC4.1 IC4.3 Q1.2
N$6: C9.2 J4.P6
N$7: J4.P2
N$8: J4.P3
N$9: J4.P5
N$10: J4.P7
N$11: D5.1
N$12: D4.2
N$13: Q3.1 R4.2
N$14: Q3.3
N$15: Q3.2 R3.2
N$16: R3.1
N$17: C1_BAT.1 CHG_LED.A MCP73831.4
N$18: CHG_LED.C R1_BAT.1
N$19: MCP73831.1 R1_BAT.2
N$20: MCP73831.5 R2_BAT.2
N$21: C2_BAT.1 MCP73831.3
N$22: R1.1 U2.10
N$23: U2.7
N$24: U2.6
N$25: U2.5
N$26: U2.4
N$27: U2.26
N$28: U2.27
N$29: U2.9
N$30: U2.8
N$31: U2.3
N$32: U2.15
N$33: C_DELAY.1 IC1.5
N$34: U2.21
N$35: U2.20
N$36: U2.19
N$37: U2.18
N$38: U2.17
N$39: U2.16
N$40: U2.24
N$41: U2.25
N$42: U2.23
N$43: U2.14
N$44: U2.13
N$45: U2.12
N$46: U2.11
N$47: EPD_C12.1 J1.24
N$49: EPD_C10.1 J1.22
N$51: EPD_C8.1 J1.20
N$52: EPD_C7.1 J1.19
N$53: D7.1 R_CAPACITOR.1
N$54: EPD_C6.1 J1.18
N$62: EPD_C2.1 J1.5
N$66: EPD_C1.1 J1.4
PREVGH: EPD_C9.1 J1.21
PREVGL: EPD_C11.1 J1.23
RESE: J1.3
RESE': R2.1 SJ1.2
RESET: C5.1 IC1.1 R_RESET.1 RESET_BUTTON.3 RESET_BUTTON.4
RTC_RST: U3.4
RX: TP2.TP
SCK: D10.2 J1.13 R6.1 TP8.TP U1.6
SCL: J3.4 R2-PINH.1 SENSOR2.4 U3.16 U4.7
SDA: J3.3 R1_PINH.1 SENSOR2.3 U3.15 U4.8
SRC: C4.1 C4.2 D3.2 D4.1 D5.2 L1.1
SS_SD: D8.2 R10.1
TX: TP1.TP
USB_D+: D1.1
USB_D-: D1.3
VBAT [net class]: TP3.TP U4.2 U4.3
VBUS [net class]: C4-USB.2 C5_USB.2 D1.5 PFMF.050.1.2 TP14.TP
VRTC [net class]: C8.1 C10_SUPERCAP.2 R_CAPACITOR.2 U3.14
VUSB [net class]: J2.A4 J2.A9 J2.B4 J2.B9 PFMF.050.1.1